# EAGLE board UBTB_MIX._spicesch (EAGLE 9.4.2)
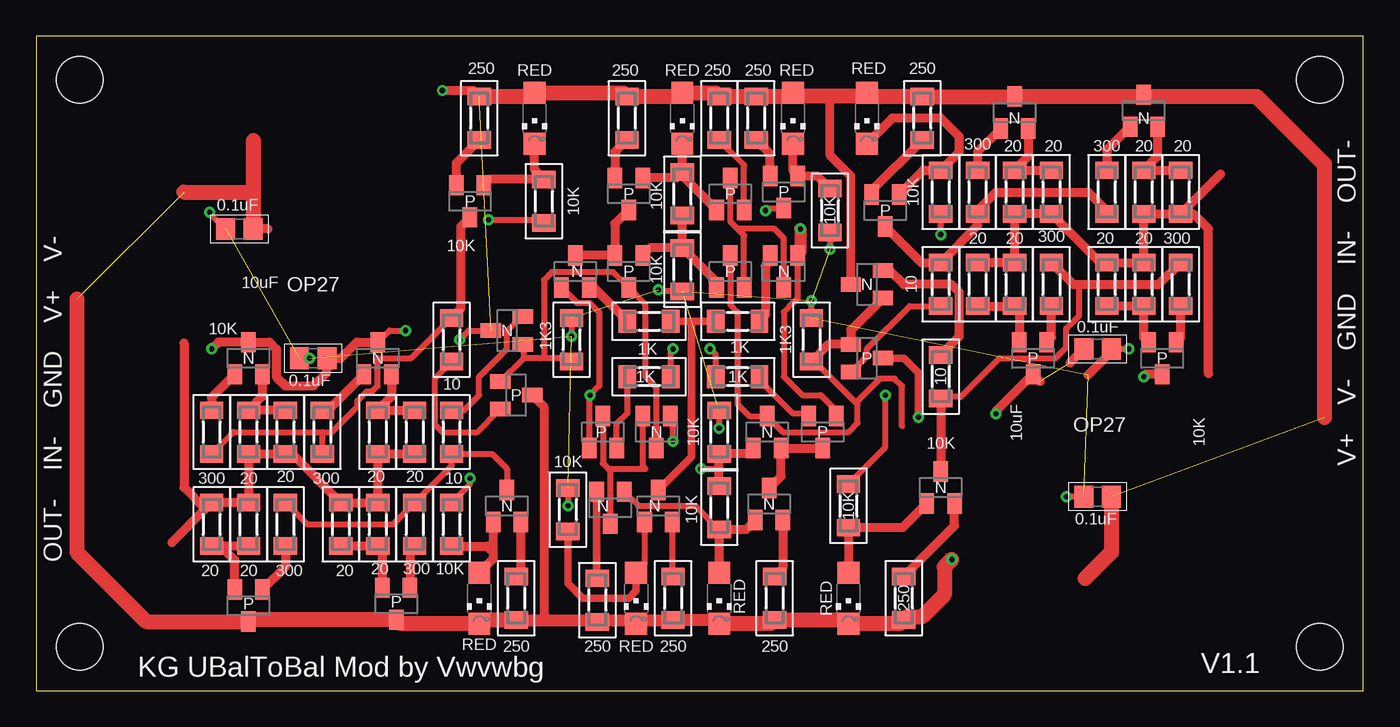
[diagram p0: board, top side]
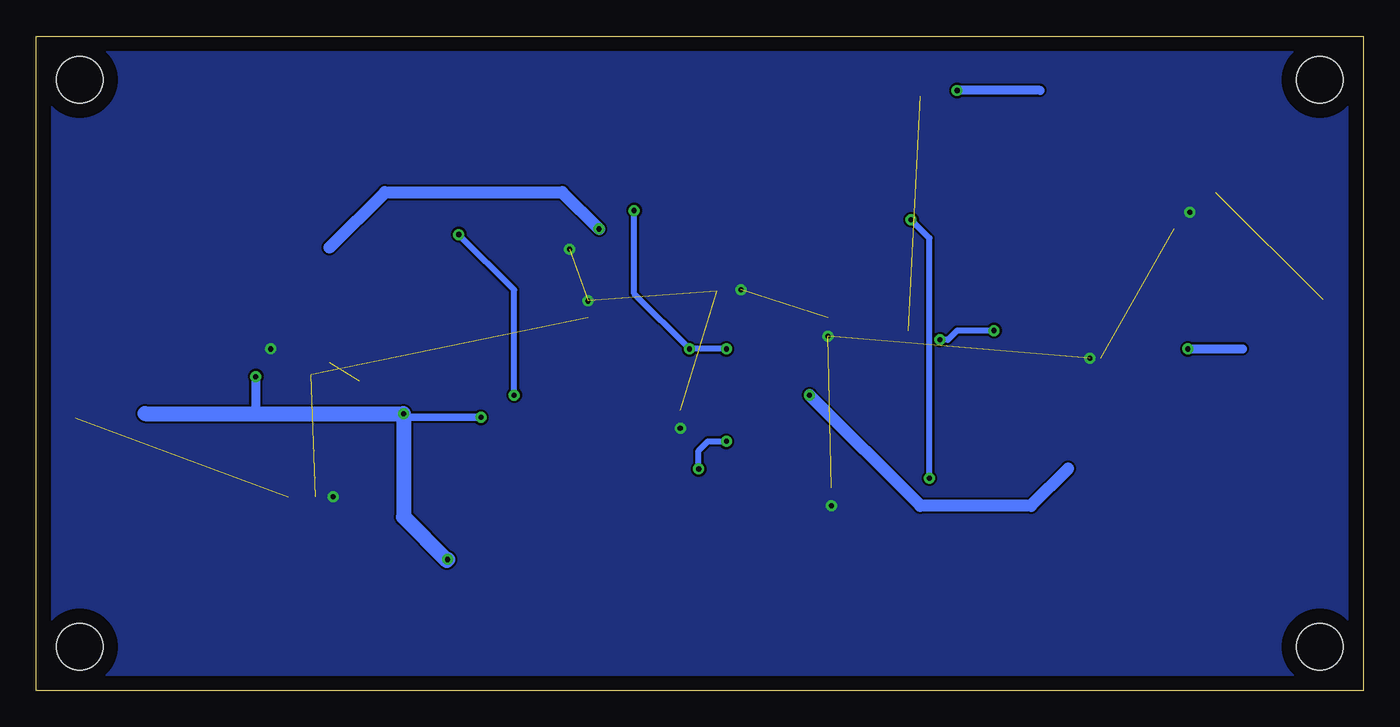
[diagram p1: board, bottom side, seen from below]

Size 91.3 x 45 mm. Coordinates in mm from the lower left corner, seen from the top.
Outline: 0,0 91.3,0 91.3,45 0,45 0,0
Copper layers (1*16): Top 0.035mm / dielectric 1.5mm / Bottom 0.035mm
Design rules "default *": minimum track width 6mil, minimum drill 0.35mm, track to track 6mil, track to pad 6mil, pad to pad 6mil, via to via 6mil, smd to smd 6mil, copper to edge 40mil, drill to drill 6mil, minimum pad ring 10mil, minimum via ring 8mil, stop-mask expansion 4mil, vias tented up to drill 0.35mm, thermal gap 10mil
Holes 3.2 mm at 3,42 88.3,3 88.3,42 3,3

## Footprints (pad centres in the part's own frame; a part is rotated, then mirrored left to right if it is on the bottom)
C0805 = smd 1.3 x 1.5: 1 -0.95,0; 2 0.95,0
CHIPLED_1206 = smd 1.5 x 1.5: A 0,-1.75; C 0,1.75
TRANSISTOR_SOT23-BEC = smd 1 x 1.4: B -0.95,-1.1; C 0,1.1; E 0.95,-1.1
SOT23 = smd 1 x 1.4: 1 -0.95,-1.1; 2 0.95,-1.1; 3 0,1.1
SOT23-BEC = smd 1 x 1.4: B -0.95,-1.1; C 0,1.1; E 0.95,-1.1
MINI_MELF-0204W = smd 1.2 x 1.6: 1 -1.5,0; 2 1.5,0

## Placement (x,y rotation side)
C2  0.0001  [C0805]  73.03,13.34 0 top
C3  0.0001  [C0805]  13.97,31.75 180 top
C5  0.0001  [C0805]  19.05,22.86 0 top
C6  0.0001  [C0805]  73.03,23.5 0 top
LED1  [CHIPLED_1206]  46.99,6.35 180 top
LED2  [CHIPLED_1206]  44.45,39.37 180 top
LED3  [CHIPLED_1206]  52.07,39.37 180 top
LED4  [CHIPLED_1206]  41.27,6.35 180 top
LED5  [CHIPLED_1206]  34.29,39.37 180 top
LED6  [CHIPLED_1206]  30.48,6.35 180 top
LED7  [CHIPLED_1206]  57.15,39.37 180 top
LED8  [CHIPLED_1206]  55.88,6.35 180 top
Q1  2SC3324  [TRANSISTOR_SOT23-BEC]  32.38,24.77 90 top
Q2  2SA1312  [TRANSISTOR_SOT23-BEC]  33.02,20.32 270 top
Q3  2SC3324  [TRANSISTOR_SOT23-BEC]  32.38,12.7 0 top
Q4  2SA1312  [TRANSISTOR_SOT23-BEC]  29.84,33.66 180 top
Q5  2SC3324  [TRANSISTOR_SOT23-BEC]  14.61,22.86 0 top
Q6  2SA1312  [TRANSISTOR_SOT23-BEC]  14.61,5.84 180 top
Q7  2SA1312  [TRANSISTOR_SOT23-BEC]  24.77,5.97 180 top
Q8  2SC3324  [TRANSISTOR_SOT23-BEC]  23.5,22.86 0 top
Q9  2SC3324  [TRANSISTOR_SOT23-BEC]  57.15,27.94 90 top
Q10  2SA1312  [TRANSISTOR_SOT23-BEC]  57.15,22.86 270 top
Q11  2SC3324  [TRANSISTOR_SOT23-BEC]  62.23,13.97 0 top
Q12  2SA1312  [TRANSISTOR_SOT23-BEC]  58.42,33.02 180 top
Q13  2SC3324  [TRANSISTOR_SOT23-BEC]  67.31,39.75 0 top
Q14  2SC3324  [TRANSISTOR_SOT23-BEC]  76.2,39.88 0 top
Q15  2SA1312  [TRANSISTOR_SOT23-BEC]  68.58,22.86 180 top
Q16  2SA1312  [TRANSISTOR_SOT23-BEC]  77.47,22.86 180 top
Q26  2SC3324  [SOT23]  42.8,12.7 0 top
Q29  2SA1312  [SOT23-BEC]  40.77,34.16 180 top
Q30  2SC3324  [SOT23]  39.5,12.57 180 top
Q31  2SC3324  [SOT23]  50.42,12.83 0 top
Q32  2SC3324  [SOT23]  50.29,17.78 0 top
Q33  2SA1312  [SOT23-BEC]  40.77,28.83 180 top
Q34  2SA1312  [SOT23-BEC]  54.1,17.78 180 top
Q35  2SA1312  [SOT23-BEC]  38.99,17.78 0 top
Q36  2SA1312  [SOT23-BEC]  51.44,34.29 180 top
Q37  2SC3324  [SOT23]  42.67,17.78 180 top
Q38  2SC3324  [SOT23]  51.44,28.83 180 top
Q39  2SC3324  [SOT23]  37.08,28.83 0 top
Q40  2SA1312  [SOT23-BEC]  47.75,34.16 0 top
Q41  2SA1312  [SOT23-BEC]  47.75,28.83 0 top
R1  250  [MINI_MELF-0204W]  30.48,39.37 90 top
R2  250  [MINI_MELF-0204W]  33.02,6.35 90 top
R3  10K  [MINI_MELF-0204W]  34.92,33.66 90 top
R4  10K  [MINI_MELF-0204W]  28.57,11.43 90 top
R5  10  [MINI_MELF-0204W]  28.57,24.13 270 top
R6  10  [MINI_MELF-0204W]  28.57,17.78 270 top
R7  300  [MINI_MELF-0204W]  12.06,17.78 270 top
R8  300  [MINI_MELF-0204W]  17.14,11.43 270 top
R9  300  [MINI_MELF-0204W]  26.04,11.43 270 top
R10  300  [MINI_MELF-0204W]  19.68,17.78 270 top
R11  20  [MINI_MELF-0204W]  14.61,17.78 90 top
R12  20  [MINI_MELF-0204W]  14.61,11.43 90 top
R13  20  [MINI_MELF-0204W]  26.04,17.78 90 top
R14  20  [MINI_MELF-0204W]  20.95,11.43 90 top
R15  250  [MINI_MELF-0204W]  60.96,39.37 90 top
R18  250  [MINI_MELF-0204W]  59.69,6.35 90 top
R19  10K  [MINI_MELF-0204W]  62.23,34.29 90 top
R20  10K  [MINI_MELF-0204W]  55.88,12.7 90 top
R21  10  [MINI_MELF-0204W]  62.23,27.94 270 top
R22  250  [MINI_MELF-0204W]  38.61,6.22 90 top
R23  250  [MINI_MELF-0204W]  50.8,6.35 90 top
R24  10  [MINI_MELF-0204W]  62.23,21.59 270 top
R25  300  [MINI_MELF-0204W]  64.77,34.29 270 top
R26  300  [MINI_MELF-0204W]  69.85,27.94 270 top
R27  300  [MINI_MELF-0204W]  78.74,27.94 270 top
R28  300  [MINI_MELF-0204W]  73.66,34.29 270 top
R29  10K  [MINI_MELF-0204W]  46.99,12.57 90 top
R30  20  [MINI_MELF-0204W]  67.31,34.29 90 top
R31  20  [MINI_MELF-0204W]  67.31,27.94 90 top
R32  10K  [MINI_MELF-0204W]  46.99,17.78 90 top
R33  10K  [MINI_MELF-0204W]  44.45,28.96 90 top
R34  10K  [MINI_MELF-0204W]  44.45,34.16 90 top
R35  250  [MINI_MELF-0204W]  40.64,39.37 90 top
R36  250  [MINI_MELF-0204W]  46.99,39.37 90 top
R37  1K3  [MINI_MELF-0204W]  36.83,24.13 270 top
R38  1K3  [MINI_MELF-0204W]  53.34,24.13 270 top
R39  1K  [MINI_MELF-0204W]  42.16,25.4 180 top
R40  1K  [MINI_MELF-0204W]  48.26,25.4 0 top
R41  1K  [MINI_MELF-0204W]  42.16,21.59 0 top
R42  1K  [MINI_MELF-0204W]  48.26,21.59 180 top
R43  250  [MINI_MELF-0204W]  49.53,39.37 90 top
R44  250  [MINI_MELF-0204W]  43.81,6.35 90 top
R45  10K  [MINI_MELF-0204W]  54.61,33.02 90 top
R46  10K  [MINI_MELF-0204W]  36.58,12.45 90 top
R47  20  [MINI_MELF-0204W]  78.74,34.29 90 top
R49  20  [MINI_MELF-0204W]  73.66,27.94 90 top
R50  20  [MINI_MELF-0204W]  17.14,17.78 90 top
R52  20  [MINI_MELF-0204W]  23.5,17.78 90 top
R53  20  [MINI_MELF-0204W]  12.06,11.43 90 top
R54  20  [MINI_MELF-0204W]  23.5,11.43 90 top
R55  20  [MINI_MELF-0204W]  69.85,34.29 90 top
R56  20  [MINI_MELF-0204W]  76.2,34.29 90 top
R57  20  [MINI_MELF-0204W]  76.2,27.94 90 top
R58  20  [MINI_MELF-0204W]  64.77,27.94 90 top

## Library data of the parts
C2 C3 C5 C6 = Vwvwbg; SPICEPREFIX: C
LED1-LED6 LED8 = led; SPICEMODEL: LED_1.7VRED; SPICEPREFIX: D
LED7 = led; SPICEMODEL: LED_1.7RED; SPICEPREFIX: D
Q1 Q3 Q5 Q8 Q9 Q11 Q13 Q14 = Vwvwbg; SPICEMODEL: 2SC3324; SPICEPREFIX: Q
Q2 Q4 Q6 Q7 Q10 Q12 Q15 Q16 = Vwvwbg; SPICEMODEL: 2SA1312; SPICEPREFIX: Q
Q26 Q30-Q32 Q37-Q39 = transistor-npn; SPICEMODEL: 2SC3324; SPICEPREFIX: Q
Q29 Q33-Q36 Q40 Q41 = transistor-pnp; SPICEMODEL: 2SA1312; SPICEPREFIX: Q
R1-R15 R18-R47 R49 R50 R52-R58 = Vwvwbg; SPICEPREFIX: R

## Nets
BOUT+: R11.1 R12.2 R13.1 R14.2 R50.1 R52.1 R53.2 R54.2
BOUT-: R30.1 R31.2 R47.1 R49.2 R55.1 R56.1 R57.2 R58.2
GND: C2.1 C3.2 C5.1 C6.2 R32.2 R33.1 R37.1 R38.1 R45.1 R46.2
IN+: Q35.B Q39.1
IN-: Q34.B Q38.1
N$4: Q2.E R5.2
N$5: Q3.E R2.2
N$6: Q4.E R1.1
N$7: LED5.C Q4.B R3.2
N$8: LED6.A Q3.B R4.1
N$9: Q4.C R5.1 R7.2 R10.2
N$10: Q3.C R6.2 R8.1 R9.1
N$11: Q1.E R6.1
N$12: R3.1 R4.2
N$13: Q5.B R7.1
N$14: Q5.E R11.2 R50.2
N$15: Q7.B R9.2
N$16: Q8.B R10.1
N$17: Q6.B R8.2
N$18: Q6.E R12.1 R53.1
N$20: Q8.E R13.2 R52.2
N$21: Q7.E R14.1 R54.1
N$25: Q11.E R18.2
N$26: Q12.E R15.1
N$27: LED7.C Q12.B R19.2
N$28: LED8.A Q11.B R20.1
N$29: Q12.C R21.1 R25.2 R28.2
N$30: Q11.C R24.2 R26.1 R27.1
N$31: Q10.E R21.2
N$32: Q9.E R24.1
N$33: R19.1 R20.2
N$34: Q13.B R25.1
N$35: Q15.B R26.2
N$36: Q14.B R28.1
N$37: Q16.B R27.2
N$38: Q13.E R30.2 R55.2
N$39: Q15.E R31.1 R58.1
N$41: Q14.E R47.2 R56.2
N$42: Q16.E R49.1 R57.1
N$93: Q30.2 R22.2
N$94: Q31.2 R23.2
N$95: Q31.3 Q32.2 Q34.C
N$96: Q30.3 Q35.C Q37.2
N$97: LED1.A Q30.1 Q31.1 R29.1
N$98: Q32.1 Q37.1 R29.2 R32.1
N$101: Q33.B Q41.B R33.2 R34.1
N$102: Q29.C Q33.E Q39.3
N$103: LED2.C Q29.B Q40.B R34.2
N$104: Q38.3 Q40.C Q41.E
N$105: Q29.E R35.1
N$106: Q40.E R36.1
N$108: LED3.C Q36.B R45.2
N$109: Q36.E R43.1
N$110: Q36.C R41.2 R42.2
N$111: Q34.E R42.1
N$112: Q35.E R41.1
N$115: Q39.2 R39.2
N$116: Q38.2 R40.2
N$117: Q26.3 R39.1 R40.1
N$118: Q26.2 R44.2
N$119: LED4.A Q26.1 R46.1
UOUT+: Q1.B Q2.B Q33.C Q37.3 R37.2
UOUT-: Q9.B Q10.B Q32.3 Q41.C R38.2
V+: C2.2 C5.2 LED2.A LED3.A LED5.A LED7.A Q1.C Q5.C Q8.C Q9.C Q13.C Q14.C R1.2 R15.2 R35.2 R36.2 R43.2
V-: C3.1 C6.1 LED1.C LED4.C LED6.C LED8.C Q2.C Q6.C Q7.C Q10.C Q15.C Q16.C R2.1 R18.1 R22.1 R23.1 R44.1

## Tracks (layer width: path | path; a pad name or v marks a point on that pad's centre or on a via)
BOUT+
  Top 0.61: 11.63,12.5 R53.2 R12.2 R11.1 R50.1 17.61,16.28 R14.2 R54.2 R52.1 R13.1 | 11.63,12.5 9.32,10.18 | 11.63,12.5 10.16,13.97 10.16,23.9
BOUT-
  Top 0.61: R58.2 R31.2 R30.1 R55.1 73.2,29.44 R49.2 R57.2 R56.1 R47.1 | R47.1 81.49,35.54 | 80.64,21.82 80.64,31.75 79.61,32.79 R47.1
GND  (via drill 0.35)  (9 unrouted)
  Top 0.406: C6.2 74.04,23.5 v75.18,23.5 | C2.1 v70.87,13.34 | R38.1 v53.34,26.8 | R45.1 v54.61,30.35 | R33.1 42.9,27.46 v42.8,27.56 | R32.2 v46.99,18.03 | R46.2 v36.58,12.7 | C5.1 v18.82,22.86 | C3.2 11.94,32.83 v11.94,32.89 | R37.1 v36.83,24.38
  Top 0.61: 74.04,23.5 74.04,23.37 72.39,21.72
  pour Bottom: 0,46.99 91.44,46.99 91.44,-2.54 0,-2.54
IN+  (via drill 0.35)
  Top 0.406: Q39.1 37.19,26.67 38.1,26.67 38.73,26.04 38.73,20.95 v38.1,20.32 38.04,20.26 Q35.B
  Bottom 0.813: 20.3,15.26 22.86,12.7 30.48,12.7 v38.1,20.32
IN-  (via drill 0.35)
  Top 0.406: Q38.1 52.38,26.98 52.08,26.67 52.07,26.67 51.44,26.04 51.44,21.59 52.7,20.32 53.98,20.32 55.05,19.24 Q34.B
  Top 0.813: v52.58,31.75 52.58,30.12 Q38.1
  Bottom 0.813: 71.14,30.46 67.31,34.29 55.12,34.29 v52.58,31.75
N$4
  Top 0.406: R5.2 27.42,21.47 27.42,18.3 27.94,17.78 30.33,17.78 Q2.E
N$5
  Top 0.61: Q3.E 33.34,8.16 R2.2
N$6
  Top 0.61: R1.1 28.89,36.28 Q4.E
N$7
  Top 0.61: Q4.B 31.2,35.16 R3.2 34.29,35.79 LED5.C
N$8
  Top 0.61: Q3.B 31.43,9.53 | 31.43,9.53 31.43,9.05 LED6.A | R4.1 31.03,9.93 31.43,9.53
N$9
  Top 0.406: R7.2 13.56,17.78 19.68,17.78 | 19.68,17.78 20.32,17.78 22.1,19.56 22.1,19.94 22.73,20.57 23.11,20.57 23.5,20.95 23.5,22.86 25.8,22.86 R5.1 | R10.2 19.68,17.78
  Top 0.61: Q4.C 29.21,31.92 29.21,26.27 R5.1
N$10
  Top 0.406: R8.1 18.64,11.43 24.54,11.43 R9.1 28.57,15.47 R6.2 31.34,16.28 32.38,15.24 Q3.C
N$11
  Top 0.406: R6.1 29.44,19.28 30.48,20.32 30.48,21.59 32.38,23.5 32.38,24.77 33.34,25.71 Q1.E
N$12  (via drill 0.35)
  Top 0.406: R4.2 29.84,14.2 v29.84,14.61 | v31.11,32.38 34.7,32.38 R3.1
  Bottom 0.406: v29.84,14.61 29.84,31.11 v31.11,32.38
N$13
  Top 0.61: Q5.B 12.06,20.17 R7.1
N$14
  Top 0.61: R50.2 R11.2 15.55,20.23 Q5.E
N$15
  Top 0.61: R9.2 25.71,9.61 Q7.B
N$16
  Top 0.61: Q8.B 20.07,19.28 R10.1
N$17
  Top 0.61: R8.2 17.14,8.53 Q6.B
N$18
  Top 0.61: R12.1 12.7,9.93 | 12.7,9.93 R53.1 | Q6.E 13.65,8.97 12.7,9.93
N$20
  Top 0.61: R13.2 R52.2 24.45,20.23 Q8.E
N$21
  Top 0.61: Q7.E 23.82,9.61 R54.1 R14.1
N$25
  Top 0.61: R18.2 63.18,11.34 Q11.E
N$26
  Top 0.61: R15.1 57.47,34.38 Q12.E
N$27
  Top 0.61: Q12.B 61.04,35.79 R19.2 63.5,37.06 63.5,38.1 62.23,39.37 58.9,39.37 LED7.C
N$28
  Top 0.61: LED8.A R20.1 59.61,11.2 Q11.B
N$29
  Top 0.61: Q12.C 60.9,29.44 R21.1 64.77,31.98 R25.2 64.77,33.02 66.04,34.29 72.39,34.29 73.66,33.02 R28.2
N$30
  Top 0.406: 71.75,27.94 71.75,25.78 70.87,24.89 70.87,23.62 70.39,23.14 70.39,23.11 70.13,22.86 66.27,22.86 63.62,20.2 62.34,20.2 R24.2
  Top 0.61: R26.1 71.35,27.94 71.75,27.94 77.24,27.94 R27.1 | R24.2 Q11.C
N$31
  Top 0.406: Q10.E 57.15,23.01 57.15,23.5 60.09,26.44 R21.2
N$32
  Top 0.61: R24.1 63.5,24.36 63.5,27.4 62.96,27.94 59.69,27.94 58.74,28.89 Q9.E
N$33  (via drill 0.35)
  Top 0.406: R20.2 58.42,16.74 v58.42,20.32 | v62.23,31.37 R19.1
  Bottom 0.406: v58.42,20.32 58.42,27.56 v62.23,31.37
N$34
  Top 0.61: Q13.B 64.77,37.06 R25.1
N$35
  Top 0.61: Q15.B 69.85,24.28 R26.2
N$36
  Top 0.61: Q14.B 73.66,37.19 R28.1
N$37
  Top 0.61: Q16.B 78.74,24.28 R27.2
N$38
  Top 0.61: Q13.E 68.26,36.74 R30.2 R55.2
N$39
  Top 0.61: R58.1 R31.1 67.63,26.12 Q15.E
N$41
  Top 0.61: Q14.E 77.15,36.74 R56.2 R47.2
N$42
  Top 0.61: Q16.E 76.2,24.28 R57.1 R49.1
N$93
  Top 0.508: Q30.2 38.55,7.72
  Top 0.61: 38.55,7.72 R22.2
N$94
  Top 0.61: Q31.2 51.37,8.42 R23.2
N$95
  Top 0.61: Q31.3 51.24,14.75 Q32.2 Q34.C
N$96
  Top 0.406: Q35.C 38.99,15.62 39.37,15.24 | 39.37,15.24 41.91,15.24 41.72,15.43 Q37.2 | Q30.3 39.5,15.11 39.37,15.24
N$97
  Top 0.406: Q30.1 41.42,12.7 45.36,12.7 R29.1
  Top 0.61: LED1.A R29.1 48.81,11.07 Q31.1
N$98  (via drill 0.35)
  Top 0.406: Q37.1 43.81,18.69 v43.81,17.14 | v45.72,15.24 46.99,15.24
  Top 0.61: R29.2 46.99,15.24 R32.1 48.94,16.28 Q32.1
  Bottom 0.406: v45.72,15.24 45.72,16.51 45.09,17.14 v43.81,17.14
N$101
  Top 0.61: Q41.B 46.8,28.1 R33.2 | R33.2 R34.1 | R33.2 42.24,30.46 Q33.B
N$102
  Top 0.61: Q29.C 39.82,32.11 Q33.E Q39.3
N$103
  Top 0.61: Q40.B 44.45,35.41 R34.2 | R34.2 LED2.C | R34.2 44.05,35.26 Q29.B
N$104
  Top 0.406: Q41.E 48.7,31.31 48.26,31.75 | Q40.C 47.75,32.26 48.26,31.75 | Q38.3 51.44,31.11 50.8,31.75 48.26,31.75
N$105
  Top 0.61: R35.1 39.82,37.05 Q29.E
N$106
  Top 0.406: Q40.E 48.7,36.16 R36.1
N$108
  Top 0.61: R45.2 53.74,35.39 Q36.B 52.07,35.7 LED3.C
N$109
  Top 0.61: Q36.E 50.48,36.91 R43.1
N$110  (via drill 0.35)
  Top 0.406: v50.16,33.02 50.34,33.19 Q36.C | R41.2 43.66,23.34 v43.81,23.5 | R42.2 46.76,23.09 v46.35,23.5
  Bottom 0.406: v50.16,33.02 50.16,27.3 v46.35,23.5 v43.81,23.5
N$111
  Top 0.406: Q34.E 52.98,19.05 52.07,19.05 49.76,21.36 R42.1
N$112
  Top 0.406: Q35.E 39.94,18.35 40.66,19.07 R41.1
N$115
  Top 0.61: R39.2 38.34,27.73 Q39.2
N$116
  Top 0.61: Q38.2 50.48,29.53 50.16,29.21 50.16,25.8 R40.2
N$117
  Top 0.508: Q26.3 45.09,16.09 45.09,25.4 | 45.09,25.4 R40.1 | 45.09,25.4 R39.1
N$118
  Top 0.406: Q26.2 43.75,7.92 R44.2
N$119
  Top 0.406: Q26.1 41.85,8.67 LED4.A
  Top 0.508: R46.1 36.58,7.37 37.59,6.35 40.77,6.35 41.27,6.86 LED4.A
UOUT+
  Top 0.406: Q37.3 42.67,20.83 41.91,21.59 41.91,26.59 Q33.C 39.71,28.79 35.49,28.79 35.28,28.57 34.92,28.22 34.92,22.86 | R37.2 36.6,22.86 34.92,22.86 | 33.51,22.86 Q2.B | 34.92,22.86 33.51,22.86 | Q1.B 33.51,23.79 33.51,22.86
UOUT-
  Top 0.406: Q41.C 47.75,26.54 48.26,26.04 48.26,19.68 49.06,18.88 Q32.3 51.39,17.78 55.88,17.78 56.52,18.41 56.52,19.68 56.39,19.81 | R38.2 53.57,22.63 56.39,19.81 | 59.56,18.18 59.56,20.95 59.05,21.46 58.04,21.46 56.39,19.81
  Top 0.61: Q9.B 56.05,24.79 Q10.B 54.52,23.81 R38.2
V+  (via drill 0.35)  (2 unrouted)
  Top 0.406: Q8.C 24.3,24.77 v25.4,24.77 | v29.11,24.13 29.75,24.77 Q1.C
  Top 0.61: Q9.C 56.05,35.39 54.61,36.83 54.61,40.87 | 19.68,23.18 C5.2 | C5.2 20,21.91 19.05,20.95 17.15,20.95 16.51,21.59 16.51,23.49 16.05,23.96 Q5.C 12.53,23.96 v12.06,23.5 | v27.94,41.27 30.07,41.27 R1.2 | C5.2 20.95,22.86 22.05,23.96 Q8.C | C2.2 73.66,13.65
  Top 1.016: R1.2 34.04,40.87 LED5.A 40.39,41.12 R35.2 44.2,40.87 LED2.A 46.74,41.12 R36.2 R43.2 51.82,40.87 | 51.82,40.87 LED3.A | 51.82,40.87 54.61,40.87 56.9,40.87 LED7.A 57.4,40.87 R15.2 60.98,40.85 Q13.C 76.07,40.85 Q14.C 76.33,40.85 83.99,40.85 88.63,36.22 88.63,18.78 | C2.2 73.97,9.51 72.16,7.69
  Bottom 0.406: v25.4,24.77 27.94,24.77 28.57,24.13 v29.11,24.13
  Bottom 0.61: v12.06,23.5 8.3,23.5 | 22.23,41.27 v27.94,41.27
V-  (via drill 0.35)  (2 unrouted)
  Top 0.406: LED1.C 46.74,4.85
  Top 0.508: Q10.C 59.69,22.86 60.71,21.84 v60.71,18.8
  Top 0.61: v66.04,19.05 66.04,19.22 Q15.C 69.07,21.27 | 71.12,22.54 C6.1 | Q16.C 76.37,21.76 v76.2,21.59 | C3.1 15.95,31.75 15.95,31.73 | Q2.C 34.92,19.52 34.92,5.1 35.18,4.85
  Top 0.813: 46.74,4.85 R44.1 41.52,4.85 38.73,4.85 R22.1 38.48,4.85 35.18,4.85 R2.1
  Top 1.016: LED1.C 50.55,4.6 R23.1 55.63,4.85 LED8.C 59.44,4.6 R18.1 59.92,5.08 60.96,5.08 62.48,6.6 62.48,8.51 v62.99,9.02 | R2.1 30.73,4.85 LED6.C 25.03,4.6 Q7.C 14.73,4.87 Q6.C 7.58,4.74 2.79,9.53 2.79,26.92 | 14.92,37.85 14.92,34.29 | 14.92,34.29 C3.1 | 10.16,34.29 14.92,34.29 | 41.52,4.85 LED4.C
  Bottom 0.508: v60.71,18.8 65.79,18.8 v66.04,19.05
  Bottom 0.61: v76.2,21.59 76.2,19.05
  Bottom 1.016: 83.82,19.05 76.2,19.05 v66.04,19.05 66.04,11.94 63.06,8.95 v62.99,9.02

## Text on the board
tPlace: 250 | RED | 250 | RED | 250 | 250 | RED | RED | 250 | N | N | 300 | 20 | 20 | 300 | 20 | 20 | P | 10K | P | 10K | P | P | 10K | 0.1uF | 10K | P | 10K | 20 | 20 | 300 | 20 | 20 | 300 | N | P | 10K | P | N | 10uF | OP27 | N | 10 | V+ V- GND IN- OUT- | 10K | N | 0.1uF | 1K3 | 1K | 1K3 | N | N | 1K | P | P | P | 1K | 1K | 10 | 0.1uF | 10 | OUT- IN- GND V+ V- | P | P | N | 10K | N | P | 10uF | OP27 | 10K | 10K | 10K | 300 | 20 | 20 | 300 | 20 | 20 | 10 | N | N | N | N | N | 10K | 10K | 0.1uF | 20 | 20 | 300 | 20 | 20 | 300 | 10K | P | P | RED | RED | 250 | RED | 250 | 250 | RED | 250 | 250 | KG UBalToBal Mod by Vwvwbg | V1.1